# Altium PCB PCB V1.0.PcbDoc (part 2 of 2)
Units mil, origin at the board's own origin, x right, y up, seen from the top; angles counter-clockwise.
Board outline 1377.95 x 1377.95 mil, 6 copper layers (SIG/GND1, GND1, PWR, SIG/GND2, GND2, SIG/GND3), stack 60.865 mil thick; 201 components, 101 nets, 556 pads, 510 vias.
Unrouted connection lines stored in the file: 86.
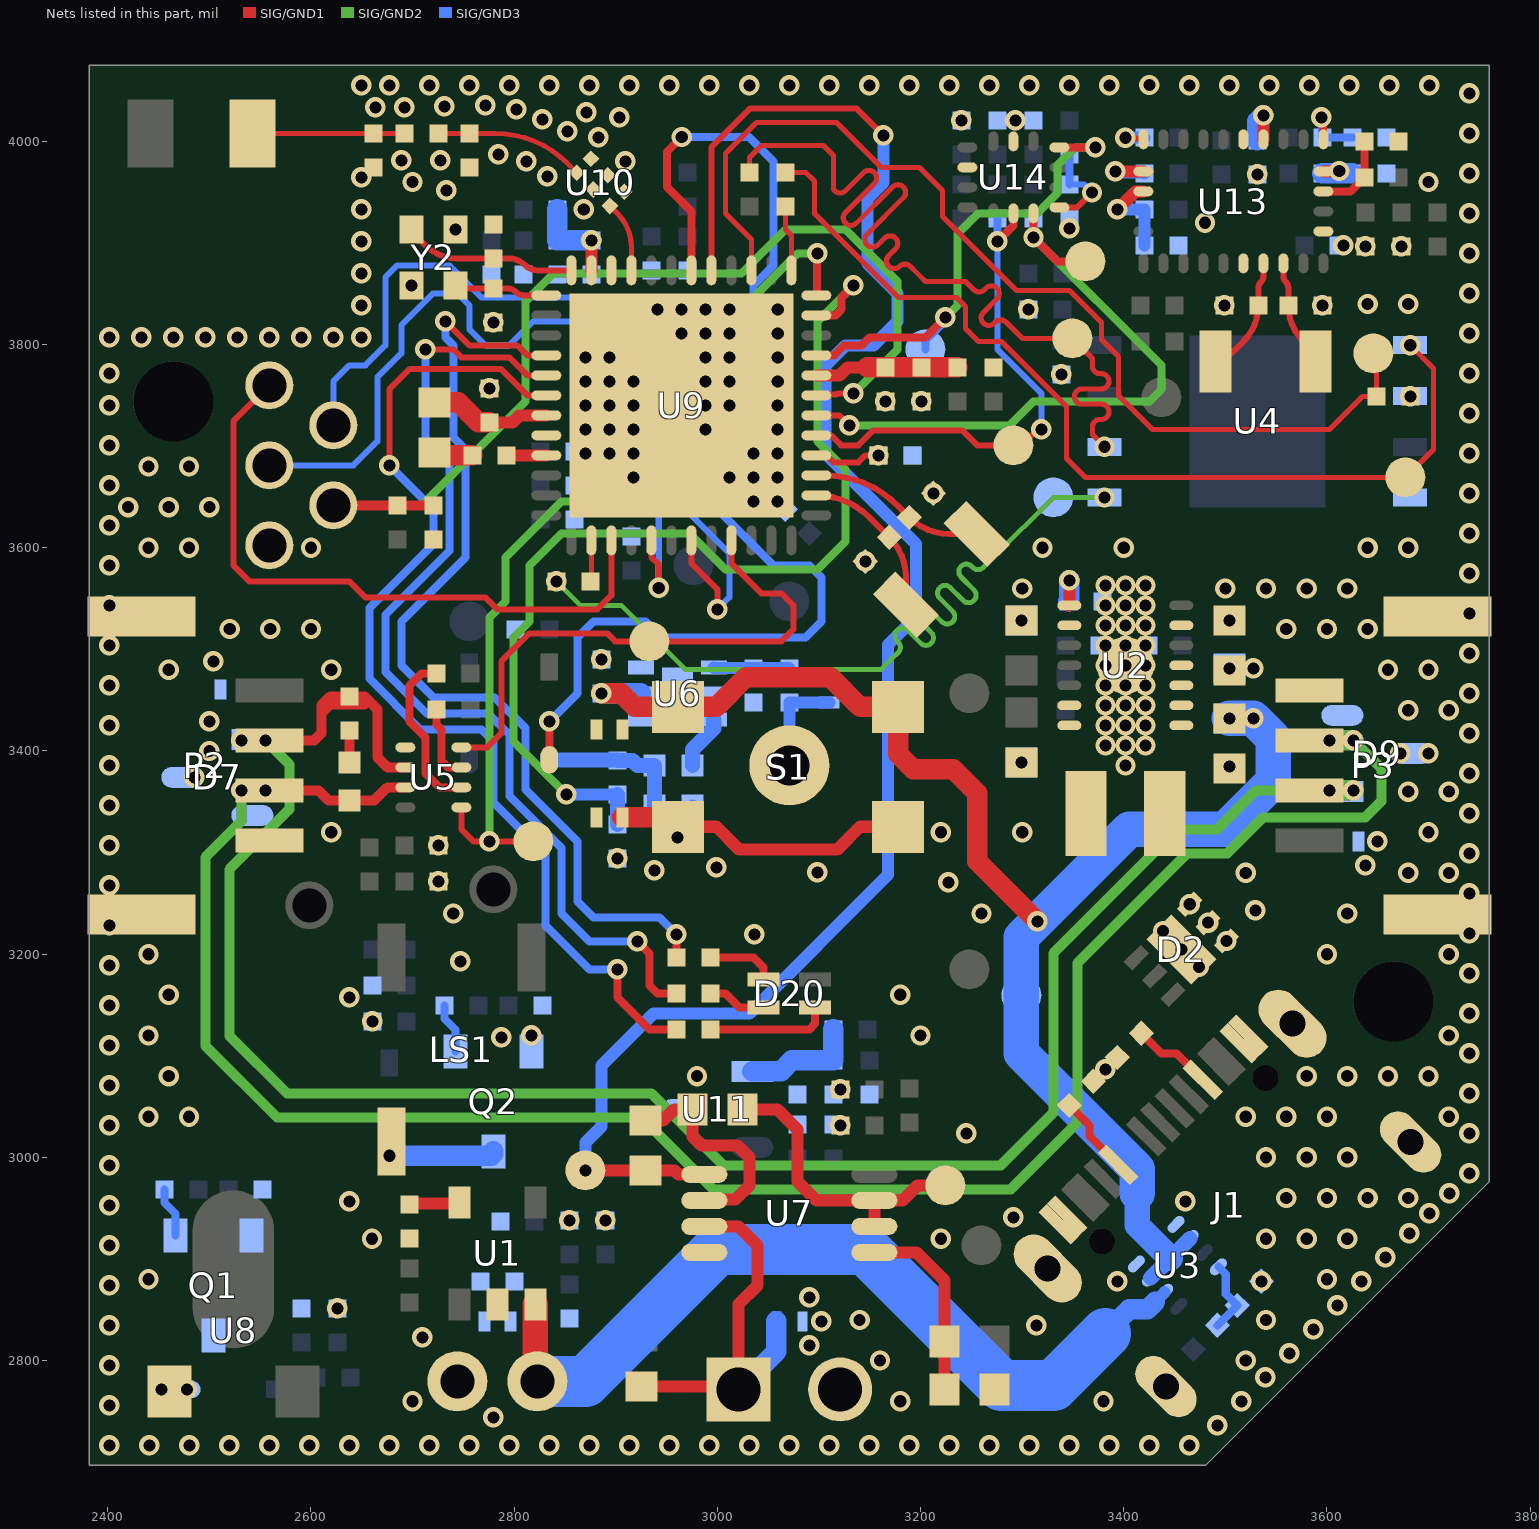
[diagram p6: the nets of this part, all layers, seen from the top]

## Via types
v1: diameter 20, hole 12, SIG/GND1 to SIG/GND3, tented both sides, 482 vias
v2: diameter 19.68, hole 11.81, SIG/GND1 to SIG/GND3, tented both sides, 28 vias

## Nets (pads, with @x,y where several pads share a name; then routed paths per layer and width w, separated by ;. In a path a pad name is that pad's centre, name@x,y a point inside that pad or via, vN(x,y) a via of type N, cw(c..) or ccw(c..) an arc to the next point about the centre after c; other vN are vias at no path point) (continued)
FLASH_CLK_1: R6.2 T17.0 U4.6 | length 923.8
  SIG/GND1 w5.04: R6.2@3031.5,3969.49 3031.5,3984.25 3043.31,3996.06 3104.33,3996.06 3114.17,3986.22 3114.17,3953.65 3114.17,3952.76 3115.51,3951.42 ccw(c3120.83,3956.74) 3126.15,3951.42 3143.92,3969.19 cw(c3149.24,3963.87) 3154.56,3969.19 cw(c3149.24,3963.87) 3154.56,3958.55 3126.12,3930.12 ccw(c3131.44,3924.8) 3126.12,3919.48 ccw(c3131.44,3924.8) 3136.76,3919.48 3172.39,3955.11 cw(c3177.7,3949.79) 3183.02,3955.11 cw(c3177.7,3949.79) 3183.02,3944.47 3147.4,3908.84 ccw(c3152.72,3903.53) 3147.4,3898.21 ccw(c3152.72,3903.53) 3158.03,3898.21 3164.65,3904.82 cw(c3169.97,3899.5) 3175.28,3904.82 cw(c3169.97,3899.5) 3175.28,3894.18 3168.67,3887.57 ccw(c3173.99,3882.25) 3168.67,3876.93 ccw(c3173.99,3882.25) 3179.31,3876.93 ; 3179.33,3876.96 cw(c3184.65,3871.64) 3189.97,3876.96 3196.8,3870.13 3198.58,3868.35 3204.72,3862.2 3244.09,3862.2 3250.49,3855.81 3252.28,3854.02 ccw(c3257.59,3859.34) 3262.91,3854.02 3264.54,3855.65 cw(c3269.86,3850.33) 3275.18,3855.65 cw(c3269.86,3850.33) 3275.18,3845.02 3261.82,3831.65 ccw(c3267.13,3826.33) 3261.82,3821.02 ccw(c3267.13,3826.33) 3272.45,3821.02 3273.55,3822.11 cw(c3278.87,3816.79) 3284.19,3822.11 3298.41,3807.89 3300.2,3806.1 T17.0@3349.41,3806.1 3369.09,3786.42 3369.09,3781.47 3369.09,3778.95 ccw(c3376.62,3778.95) 3376.62,3771.43 3377.85,3771.43 cw(c3377.85,3763.91) 3377.85,3756.39 3358.96,3756.39 ccw(c3358.96,3748.87) 3358.96,3741.35 3377.85,3741.34 cw(c3377.85,3733.82) 3377.85,3726.3 3376.62,3726.3 ccw(c3376.62,3718.78) 3369.09,3718.78 3369.09,3711.42 3372.1,3708.42 v1(3381.1,3699.41)
FLASH_CS: R12.1 U9.13 | length 65.4
  SIG/GND1 w5.04: R12.1@3066.93,3936.02 3066.93,3913.39 3072.83,3907.48 U9.13@3072.83,3873.03
FLASH_CS_1: R12.2 T19.0 U4.1 | length 946.9
  SIG/GND1 w5.04: R12.2@3066.93,3969.49 3086.98,3969.49 3095.47,3961 3095.47,3929.13 3178.15,3846.46 3235.24,3846.46 3244.09,3837.6 3244.09,3815.94 3256.89,3803.15 3279.53,3803.15 3343.5,3739.17 3343.5,3687.99 3362.2,3669.29 T19.0@3677.17,3669.29 3704.72,3696.85 3704.72,3776.57 v1(3681.89,3799.41)
FLASH_DI: R7.1 U9.38 | length 40.8
  SIG/GND1 w5.04: R7.1@2875,3566.93 2875.98,3567.91 U9.38@2875.98,3607.28
FLASH_DI_1: R7.2 T18.0 U4.5 | length 874.2
  SIG/GND2 w4.84: v1(2841.54,3566.93) 2865.16,3543.31 2905.51,3543.31 2968.5,3480.32 3161.42,3480.32 3176.18,3495.08 3177.89,3496.79 ccw(c3172.65,3502.04) 3177.89,3507.28 3176.86,3508.31 cw(c3182.11,3513.56) 3176.86,3518.81 cw(c3182.11,3513.56) 3187.35,3518.81 3200.03,3506.13 ccw(c3205.27,3511.38) 3210.52,3506.13 ccw(c3205.27,3511.38) 3210.52,3516.62 3197.84,3529.3 cw(c3203.09,3534.54) 3197.84,3539.79 cw(c3203.09,3534.54) 3208.34,3539.79 3221.01,3527.11 ccw(c3226.26,3532.36) 3231.5,3527.11 ccw(c3226.26,3532.36) 3231.5,3537.61 3218.83,3550.28 cw(c3224.07,3555.53) 3218.83,3560.77 cw(c3224.07,3555.53) 3229.32,3560.77 3242,3548.1 ccw(c3247.24,3553.34) 3252.49,3548.1 ccw(c3247.24,3553.34) 3252.49,3558.59 3239.81,3571.27 cw(c3245.06,3576.51) 3239.81,3581.76 cw(c3245.06,3576.51) 3250.3,3581.76 3251.34,3580.73 ccw(c3256.58,3585.97) 3261.83,3580.73 3271.65,3590.55 3330.51,3649.41 v1(3381.1,3649.41)
  SIG/GND3 w5.04: T18.0@3330.71,3649.61 3380.91,3649.61 v1(3381.1,3649.41)
FLASH_DO: R13.1 T20.0 U9.15 | length 1008.6
  SIG/GND1 w5.04: U9.15@3033.46,3873.03 3033.46,3903.54 3007.87,3929.13 3007.87,3988.19 3038.39,4018.7 3117.13,4018.7 3161.42,3974.41 3198.82,3974.41 3221.46,3951.77 3221.46,3926.18 3294.29,3853.35 3346.46,3853.35 3377.95,3821.85 3377.95,3805.12 3394.68,3788.39 3394.68,3750 3428.15,3716.54 3602.36,3716.54 3634.84,3749.02 R13.1@3648.62,3749.02 3648.62,3788.39 T20.0@3645.67,3791.34
FLASH_DO_1: R13.2 U4.2
  other v1: 3682.09,3749.02
FLEX_SENSE: R27.1 T21.0 U7.1 U9.17 | length 1746.1
  SIG/GND1 w6: U9.17@2994.09,3873.03 2994.09,3994.09 3032.48,4032.48 3136.81,4032.48 v1(3163.39,4005.91)
  SIG/GND1 w12: v1(2870.08,2987.2) R27.1@2929.13,2987.2 2957.68,2987.2 2961.61,2983.27 U7.1@2987.2,2983.27
  SIG/GND3 w12: v1(2870.08,2987.2) 2870.08,3014.76 2885.83,3030.51 2885.83,3090.55 2937.01,3141.73 3031.5,3141.73 3167.94,3278.18 3167.94,3504.64 3195.5,3532.2 3195.5,3603.71 3106.3,3692.91 3106.3,3779.53 3125.98,3799.21 3153.54,3799.21 3177.17,3822.83 3177.17,3850.39 3147.64,3879.92 3147.64,3943.9 3163.39,3959.65 v1(3163.39,4005.91)
GND: C1.1 C2.1 C3.2 C4.2 C5.2 C6.2 C7.2 C8.2 C9.2 C10.1 C11.2 C12.2 C13.2 C14.2 C15.1 C16.2 C17.2 C18.1 C19.2 C25.1 C26.2 C27.2 C28.2 C29.2 C32.2 C33.2 C34.2 C35.2 C36.2 C37.2 C38.2 C39.2 C40.2 C41.2 C42.2 C43.2 C44.2 C45.2 C46.2 C47.2 C48.2 C49.2 C50.2 C51.2 C52.2 C53.2 C54.2 C55.2 C56.2 C57.2 C80.2 C81.2 C82.2 C83.2 C84.2 C85.2 C86.2 C87.2 C88.2 D1.2 D2.1 D2.2 D2.3 D2.7 D6.2 D7.3 D8.2 D9.3 D10.2 D11.2 D12.2 D13.2 J1.A1 J1.A12 J1.B1 J1.B12 J1.S1 J1.S2 J1.S3 J1.S4 P2.4 P2.5 P2.6 P3.4 P3.5 P3.6 P4.2 Q1.S Q2.S R1.2 R4.1 R5.2 R9.1 R11.1 R14.1 R15.1 R24.2 R31.1 R34.1 R37.1 R39.1 R42.1 R47.1 R48.1 R49.1 R58.2 T2.0 T13.0 U1.2 U2.2 U2.13 U2.15 U3.1 U3.8 U4.4 U5.5 U6.2 U6.4 U6.6 U6.7 U7.4 U9.22 U9.32 U9.49 U10.A2 U10.B1 U10.B2 U10.B3 U11.3 U13.2 U13.10 U13.25 U14.6 Y2.2 Y2.4
  other v1: 2401.57,2716.54 2440.94,2716.54 2480.31,2716.54 2519.68,2716.54 2559.05,2716.54 2598.42,2716.54 2637.79,2716.54 2677.16,2716.54 2716.53,2716.54 2755.9,2716.54 2795.27,2716.54 2834.64,2716.54 2874.01,2716.54 2913.39,2716.54 2952.76,2716.54 2992.13,2716.54 3031.5,2716.54 3070.87,2716.54 3110.24,2716.54 3149.61,2716.54 3188.98,2716.54 3228.35,2716.54 3267.72,2716.54 3307.09,2716.54 3346.46,2716.54 3385.83,2716.54 3425.2,2716.54 3464.57,2716.54 3492.13,2736.22 2779.53,2744.09 2401.57,2755.91 2700,2760 3180,2760 3380,2760 3515.75,2759.84 3539.37,2783.46 2401.57,2795.28 3160,2800 3520,2800 3562.99,2807.09 3090.55,2814.96 2709.65,2822.83 3586.61,2830.71 2401.57,2834.65 3313.98,2834.65 3102.36,2838.58 3140,2840 3540,2840 2625.98,2851.38 3610.24,2854.33 3090.55,2862.2 2401.57,2874.02 3393.7,2877.95 3535.45,2877.97 3633.86,2877.95 2440,2880 3600,2880 3657.48,2901.57 2401.57,2913.39 2660,2920 3220,2920 3540,2920 3580,2920 3620,2920 3681.1,2925.2 2854.33,2937.99 2889.76,2937.99 3291.34,2940.94 3700.79,2944.88 2401.57,2952.76 2637.8,2956.69 3460.63,2956.69 3560,2960 3600,2960 3640,2960 3680,2960 3720.47,2964.57 3740.16,2984.25 2401.57,2992.13 3540,3000 3580,3000 3620,3000 3245.08,3023.62 3740.16,3023.62 2401.57,3031.5 3121.06,3031.5 2440,3040 2480,3040 3520,3040 3560,3040 3600,3040 3720,3040 3740.16,3062.99 3121.06,3066.93 2401.57,3070.87 2460,3080 2980,3080 3580,3080 3620,3080 3660,3080 3700,3080 3381.89,3086.61 3740.16,3102.36 2401.57,3110.24 2787.4,3118.11 2440,3120 2816.93,3120.08 3200,3120 3720,3120 2660.43,3133.86 3740.16,3141.73 2401.57,3149.61 2637.8,3157.48 2460,3160 3180,3160 3740.16,3181.1 3473.94,3187.48 2401.57,3188.98 2747.05,3192.91 2440,3200 3600,3200 3720,3200 3456.69,3204.72 3501.1,3212.94 3036.42,3219.49 3740.16,3220.47 3438.6,3222.82 2401.57,3228.35 3483,3231.03 2740,3240 3260,3240 3620,3240 3529.53,3243.11 3464.91,3249.13 3740.16,3259.84 2401.57,3267.72 3227.36,3270.67 2725.39,3271.65 3520,3280 3680,3280 3720,3280 3098.43,3280.51 2937.99,3282.48 2999.02,3285.43 3637.8,3287.4 2901.57,3294.29 3740.16,3299.21 2401.57,3307.09 2725.39,3307.09 3649.61,3311.02 2620,3320 3220,3320 3300,3320 3700,3320 3740.16,3338.58 2401.57,3346.46 3680,3360 3720,3360 2485.22,3374.02 3740.16,3377.95 3503.94,3384.84 2401.57,3385.83 3299.21,3388.78 3672.26,3397.64 3699.82,3397.64 2500,3400 3740.16,3417.32 2401.57,3425.2 2500,3429.13 3680,3440 3720,3440 3740.16,3456.69 2401.57,3464.57 2460,3480 2620,3480 3660,3480 3700,3480 2503.94,3488.19 2885.83,3490.16 3740.16,3496.06 2401.57,3503.94 2520,3520 2560,3520 2600,3520 3560,3520 3600,3520 3640,3520 3299.21,3528.54 3503.94,3528.54 3740.16,3535.43 2401.57,3543.31 3300,3560 3500,3560 3540,3560 3580,3560 3620,3560 3740.16,3574.8 2401.57,3582.68 3145.65,3586.59 2440,3600 2480,3600 2600,3600 3320,3600 3400,3600 3640,3600 3680,3600 3740.16,3614.17 2401.57,3622.05 2420,3640 2460,3640 2500,3640 3035.43,3645.67 3059.05,3645.67 3212.62,3653.56 3740.16,3653.54 2401.57,3661.42 2917.32,3669.29 3011.81,3669.29 3035.43,3669.29 3059.05,3669.29 2440,3680 2480,3680 2870.08,3692.91 2893.7,3692.91 2917.32,3692.91 3035.43,3692.91 3059.05,3692.91 3740.16,3692.91 2401.57,3700.79 2870.08,3716.54 2893.7,3716.54 2917.32,3716.54 2988.19,3716.54 3059.05,3716.54 3740.16,3732.28 2401.57,3740.16 2870.08,3740.16 2893.7,3740.16 2917.32,3740.16 2988.19,3740.16 3011.81,3740.16 3059.05,3740.16 3165.35,3744.1 3200.79,3744.1 2775.59,3756.89 2870.08,3763.78 2893.7,3763.78 2917.32,3763.78 2988.19,3763.78 3011.81,3763.78 3059.37,3763.78 3338.58,3770.67 2401.57,3771.65 3740.16,3771.65 2870.08,3787.4 2893.7,3787.4 2988.19,3787.4 3011.81,3787.4 3059.37,3787.4 2401.57,3807.09 2433.07,3807.09 2464.57,3807.09 2496.06,3807.09 2527.56,3807.09 2559.05,3807.09 2590.55,3807.09 2622.05,3807.09 2649.61,3807.09 2964.57,3811.02 2988.19,3811.02 3011.81,3811.02 3059.37,3811.02 3740.16,3811.02 2779.53,3821.85 2940.94,3834.65 2964.57,3834.65 2988.19,3834.65 3011.81,3834.65 3059.37,3834.65 3306.1,3834.65 2649.61,3838.58 3499.02,3838.58 3595.47,3838.58 3640,3840 3680,3840 3740.16,3850.39 2698.82,3858.27 2649.61,3870.08 3740.16,3889.76 3637.8,3896.65 3673.23,3896.65 3616.14,3897.64 2649.61,3901.58 2742.12,3913.39 3346.46,3914.37 3480,3920 3740.16,3929.13 2649.61,3933.07 2868.52,3933.07 2733.27,3951.77 2700,3960 3700,3960 2649.61,3964.57 2832.68,3965.55 3531.5,3967.52 3740.16,3968.5 2812.01,3980.32 2909.45,3980.32 2688.98,3981.3 2727.36,3981.3 2784.45,3987.2 2882.87,4003.94 3740.16,4007.87 2852.36,4009.84 3240.16,4020.67 3293.31,4020.67 2827.76,4021.65 2903.54,4023.62 2871.06,4028.54 2802.17,4031.5 2663.39,4033.46 2691.93,4033.46 2731.3,4034.45 2771.65,4035.43 3740.16,4047.24 2649.61,4055.12 2677.16,4055.12 2716.53,4055.12 2755.91,4055.12 2795.28,4055.12 2834.65,4055.12 2874.02,4055.12 2913.39,4055.12 2952.76,4055.12 2992.13,4055.12 3031.5,4055.12 3070.87,4055.12 3110.24,4055.12 3149.61,4055.12 3188.98,4055.12 3228.35,4055.12 3267.72,4055.12 3307.09,4055.12 3346.46,4055.12 3385.83,4055.12 3425.2,4055.43 3464.57,4055.12 3503.94,4055.12 3543.31,4055.12 3582.68,4055.12 3622.05,4055.12 3661.42,4055.12 3700.79,4055.12
  other v2: 3401.57,3385.83 3381.89,3405.51 3401.57,3405.51 3421.26,3405.51 3381.89,3425.2 3401.57,3425.2 3421.26,3425.2 3381.89,3444.88 3401.57,3444.88 3421.26,3444.88 3381.89,3464.57 3401.57,3464.57 3421.26,3464.57 3381.89,3484.25 3401.57,3484.25 3421.26,3484.25 3381.89,3503.94 3401.57,3503.94 3421.26,3503.94 3381.89,3523.62 3401.57,3523.62 3421.26,3523.62 3381.89,3543.31 3401.57,3543.31 3421.26,3543.31 3381.89,3562.99 3401.57,3562.99 3421.26,3562.99
ICM_INT1: T29.0 U9.9 U14.4 | length 491.8
  SIG/GND1 w8: U9.9@3097.44,3789.37 3114.59,3789.37 3124.43,3799.21 3141.73,3799.21 3149.6,3807.09 3204.72,3807.09 v1(3224.41,3826.77) ; U14.4@3336.61,3994.09 v1(3372.05,3994.09)
  SIG/GND2 w8: v1(3224.41,3826.77) 3236.22,3838.58 3236.22,3908.83 3256.52,3929.13 3314.49,3929.13 3334.65,3949.29 3334.65,3976.85 3351.89,3994.09 v1(3372.05,3994.09)
  SIG/GND3 w8: T29.0@3204.72,3795.28 3204.72,3803.76 3222.11,3821.15 3222.11,3824.48 v1(3224.41,3826.77)
ICM_INT2/FSYNC: U14.9
ICM_SCL: R61.2 T28.0 U9.5 U14.13 | length 504
  SIG/GND1 w6: U9.5@3097.44,3710.63 3112.02,3710.63 3121.86,3700.79 3138.78,3700.79 3153.54,3715.55 3241.14,3715.55 3255.91,3700.79 3299.36,3700.79 3315.11,3716.54 v1(3318.9,3716.54)
  SIG/GND1 w8: v1(3275.59,3901.57) 3291.34,3917.32 U14.13@3291.34,3929.13
  SIG/GND3 w6: v1(3275.59,3901.57) 3275.59,3795.28 3318.9,3751.97 v1(3318.9,3716.54)
  SIG/GND3 w8: v1(3275.59,3901.57) R61.2@3275.59,3924.21
ICM_SDA: R60.2 T27.0 U9.6 U14.14 | length 663.3
  SIG/GND1 w6: U9.6@3097.44,3730.32 3120.08,3730.32 v1(3129.92,3720.47)
  SIG/GND1 w8: U14.14@3311.02,3929.13 3311.08,3929.07 3311.08,3905.55 v1(3311.14,3905.49) 3334.75,3881.89 T27.0@3362.2,3881.89
  SIG/GND2 w8: v1(3129.92,3720.47) 3287.4,3720.47 3311.02,3744.09 3425.2,3744.09 3437.01,3755.91 3437.01,3779.63 v1(3311.14,3905.49)
  SIG/GND3 w8: R60.2@3311.02,3924.21 3311.08,3924.15 3311.08,3905.55 v1(3311.14,3905.49)
IMU_XIN32: C84.1 U13.27 Y5.1 | length 109.9
  SIG/GND1 w6: U13.27@3557.09,3879.92 3557.09,3866.96 ccw(c3563.81,3866.96) 3559.06,3862.2 cw(c3551.93,3855.08) 3562.01,3855.08 C84.1@3562.01,3838.58 ccw(c3611.91,3838.58) 3576.62,3803.3 Y5.1@3596.46,3783.46
IMU_XOUT32: C85.1 U13.26 Y5.2 | length 109.9
  SIG/GND1 w6: Y5.2@3498.03,3783.46 3517.86,3803.3 ccw(c3482.58,3838.58) C85.1@3532.48,3838.58 3532.48,3855.08 cw(c3542.56,3855.08) 3535.43,3862.2 ccw(c3530.68,3866.96) 3537.4,3866.96 U13.26@3537.4,3879.92
MCU2_ANT: U9.21 U10.A3 | length 70.1
  SIG/GND1 w5.04: U10.A3@2894.29,3936.42 2901.57,3929.13 cw(c2868.31,3895.87) 2915.35,3895.87 U9.21@2915.35,3873.03
MCU2_BOOT0: R36.1 R37.2 U9.4 | length 66.7
  SIG/GND1 w6: U9.4@3097.44,3690.95 3098.69,3689.69 3108.54,3689.69 3114.17,3684.06 3138.78,3684.06 3145.67,3690.95 v1(3158.46,3690.95)
MCU2_NRST: C48.1 R35.1 T11.0 U9.7 | length 1010.3
  SIG/GND1 w6: U9.7@3097.44,3750 3098.18,3750.74 3116.88,3750.74 3118.11,3751.97 v1(3133.86,3751.97)
  SIG/GND1 w10: T11.0@2622.05,3641.73 R35.1@2685.04,3641.73 C48.1@2720.47,3641.73
  SIG/GND2 w8: T11.0@2622.05,3641.73 2708.66,3641.73 2811.02,3744.1 2811.02,3842.52 2838.58,3870.08 3023.62,3870.08 3066.93,3913.39 3125.98,3913.39 3177.17,3862.2 3177.17,3795.28 v1(3133.86,3751.97)
MCU2_PA13_CLK: T10.0 U9.41 | length 832.4
  SIG/GND1 w6: U9.41@2935.04,3607.28 2935.04,3590.83 2942.25,3583.62 v1(2942.25,3560.56)
  SIG/GND3 w6: T10.0@2559.05,3681.1 2641.73,3681.1 2665.35,3704.73 2665.35,3767.72 2688.98,3791.34 2688.98,3818.9 2720.47,3850.39 2744.09,3850.39 2755.9,3838.58 2755.9,3814.96 2771.65,3799.21 2795.27,3799.21 2818.9,3822.84 2889.76,3822.84 2942.25,3770.35 v1(2942.25,3560.56)
MCU2_PA13_DIO: T9.0 U9.39 | length 641.7
  SIG/GND1 w6: T9.0@2559.05,3759.84 2523.62,3724.41 2523.62,3582.68 2539.37,3566.93 2637.8,3566.93 2653.54,3551.18 2771.65,3551.18 2783.46,3539.37 2881.89,3539.37 2895.67,3553.15 U9.39@2895.67,3607.28
MCU2_PB3_SWO: T12.0 U9.43 | length 851.6
  SIG/GND1 w6: U9.43@2974.41,3607.28 2974.41,3584.65 3000,3559.06 v1(3000,3539.37)
  SIG/GND3 w6: T12.0@2622.05,3720.47 2622.05,3763.78 2637.79,3779.53 2653.54,3779.53 2673.23,3799.21 2673.23,3866.14 2685.04,3877.95 2736.22,3877.95 2767.72,3846.46 2889.76,3846.46 2956.69,3779.53 2956.69,3649.61 3011.81,3594.49 3011.81,3551.18 v1(3000,3539.37)
MCU2_VFBSMPS: C47.1 L5.1 U9.31 | length 121.2
  SIG/GND1 w12: C47.1@2775.59,3723.43 2798.23,3723.43 2805.12,3730.32 U9.31@2831.69,3730.32
  SIG/GND1 w20: L5.1@2721.46,3743.11 2745.08,3743.11 2764.76,3723.43 C47.1@2775.59,3723.43
MCU2_VLXSMPS: L4.2 U9.33 | length 39.4
  SIG/GND1 w12: L4.2@2792.32,3690.95 U9.33@2831.69,3690.95
NetANT1_1: ANT1.1 C57.1 L6.2 | length 149.6
  SIG/GND1 w5.04: ANT1.1@2542.32,4007.88 C57.1@2661.42,4007.88 L6.2@2691.93,4007.88
NetC14_1: C14.1 C15.2 FB5.2 U11.1 | length 114.7
  SIG/GND3 w20: U11.1@3034.47,3084.65 3034.75,3084.93 3062.73,3084.93 3073.27,3095.47 C15.2@3078.74,3095.47 C14.1@3114.17,3095.47 FB5.2@3114.17,3125.98
NetC16_1: C16.1 FB2.2 U2.10 U2.11
  other v1: 3503.94,3481.3 3527.56,3481.3
NetC17_1: C17.1 U2.1 | length 45.8
  SIG/GND1 w12: U2.1@3346.46,3543.31 v1(3346.46,3567.91)
  SIG/GND3 w20: C17.1@3345.47,3547.24 ccw(c3345.47,3548.23) 3346.46,3548.23 v1(3346.46,3567.91)
NetC29_1: C29.1 R20.1 U6.1 | length 74.8
  SIG/GND3 w12: U6.1@2996.46,3482.28 2996.95,3481.79 3070.37,3481.79 R20.1@3070.87,3481.3
NetC37_1: C37.1 C38.1 FB8.1 U9.23 | length 93.5
  SIG/GND1 w12: U9.23@2875.98,3873.03 v1(2875.98,3902.56)
  SIG/GND3 w20: FB8.1@2842.52,3933.07 C38.1@2842.52,3902.56 v1(2875.98,3902.56)
NetC49_1: C49.1 C50.1 FB9.1 U9.8 | length 142
  SIG/GND1 w12: U9.8@3097.44,3769.69 3120.08,3769.69 3127.95,3777.56 3147.64,3777.56
  SIG/GND1 w20: 3147.64,3777.56 C49.1@3165.35,3777.56 C50.1@3200.79,3777.56 FB9.1@3236.22,3777.56
NetC52_1: C52.1 U9.2 Y1.1 | length 156.5
  SIG/GND1 w6: U9.2@3097.44,3651.58 cw(c3097.44,3577.81) 3149.6,3629.97 C52.1@3169.31,3610.26 cw(c3129.81,3570.76) 3185.67,3570.76 Y1.1@3185.67,3543.94
NetC53_1: C53.1 U9.3 Y1.2 | length 175
  SIG/GND1 w6: U9.3@3097.44,3671.26 3106.17,3671.26 cw(c3106.17,3571.26) 3176.89,3641.97 C53.1@3188.95,3629.9 ccw(c3228.46,3669.4) 3228.46,3613.54 Y1.2@3255.27,3613.54
NetC54_1: C54.1 U9.24 Y2.1 | length 171.5
  SIG/GND1 w6: Y2.1@2698.82,3913.39 ccw(c2703.57,3913.39) 2700.21,3910.03 2712.6,3897.64 ccw(c2743.49,3928.53) 2743.49,3884.84 C54.1@2779.53,3884.84 2794.39,3884.84 cw(c2794.39,3861.32) 2811.02,3877.95 ccw(c2822.9,3889.83) 2822.9,3873.03 U9.24@2856.3,3873.03
NetC55_1: C55.1 U9.25 Y2.3 | length 92.2
  SIG/GND1 w6: Y2.3@2742.12,3858.27 ccw(c2749.25,3865.4) 2749.25,3855.32 C55.1@2779.53,3855.32 2793.58,3855.32 cw(c2793.58,3844.39) 2801.31,3852.11 ccw(c2810.21,3861.02) 2810.21,3848.43 U9.25@2831.69,3848.43
NetC56_1: C56.1 L6.1 U10.A1 | length 148
  SIG/GND1 w5.04: L6.1@2725.39,4007.88 C56.1@2755.9,4007.88 2781.41,4007.88 cw(c2781.41,3907.88) 2852.12,3978.59 U10.A1@2861.61,3969.1
NetC83_1: C83.1 U13.9 | length 50.7
  SIG/GND1 w12: U13.9@3537.4,4001.97 v1(3537.4,4025.59)
  SIG/GND3 w20: C83.1@3531.5,4000.98 3531.5,4019.68 v1(3537.4,4025.59)
NetD4_2: D4.2 U9.18 | length 1187.5
  SIG/GND1 w8: D4.2@2834.65,3391.34 v1(2834.65,3429.13) ; v1(2965.01,4004.39) 2950.47,3989.84 2950.47,3955.04 2974.41,3931.1 U9.18@2974.41,3873.03
  SIG/GND3 w8: v1(2834.65,3429.13) 2862.2,3456.69 2862.2,3511.81 2877.95,3527.56 2929.13,3527.56 2944.88,3511.81 3086.61,3511.81 3102.36,3527.56 3102.36,3570.87 3090.55,3582.68 3055.12,3582.68 2988.19,3649.61 2988.19,3681.1 3035.43,3728.35 3035.43,3858.27 3055.12,3877.95 3055.12,3980.32 3031.05,4004.39 v1(2965.01,4004.39)
NetD5_2: D5.2 R21.2 R22.2 R23.1 | length 145
  SIG/GND3 w15: D5.2@2834.65,3391.34 2834.94,3391.04 2901.28,3391.04 R21.2@2901.57,3390.75 2916.34,3390.75 2921.26,3385.83 R22.2@2937.99,3385.83 R23.1@2937.99,3346.46
NetD10_1: D10.1 P4.1 R25.1 U7.3 | length 388.1
  SIG/GND1 w12: R25.1@2925.2,2774.61 3013.74,2774.61 cw(c3013.74,2764.52) P4.1@3020.87,2771.65 3020.87,2855.51 3039.37,2874.02 3039.37,2913.39 3020.67,2932.09 U7.3@2987.2,2932.09
  SIG/GND3 w20: P4.1@3020.87,2771.65 3058.07,2808.86 D10.1@3058.07,2838.58
NetD12_1: D12.1 R23.2 S1.3 S1.4 | length 332.8
  SIG/GND1 w12: S1.3@2961.46,3325.35 2999.14,3325.35 3021.34,3303.15 3118.11,3303.15 3140.31,3325.35 S1.4@3178,3325.35
  SIG/GND1 w20: D12.1@2906.5,3334.65 2952.16,3334.65 cw(c2952.16,3325.35) S1.3@2961.46,3325.35
  SIG/GND3 w12: v1(2960.63,3314.96) 2975.39,3329.72 R23.2@2975.39,3346.46
NetD20_1: D20.1 R28.2 | length 68.1
  SIG/GND1 w8: R28.2@2993.11,3196.85 3035.43,3196.85 3045.47,3186.81 D20.1@3045.47,3175.2
NetD20_3: D20.3 R32.1 | length 121.5
  SIG/GND1 w8: R32.1@2993.11,3125.98 3090.55,3125.98 3096.26,3131.69 D20.3@3096.26,3147.64
NetD20_4: D20.4 R29.1 | length 58.1
  SIG/GND1 w8: R29.1@2993.11,3161.42 3007.87,3161.42 3021.65,3147.64 D20.4@3045.47,3147.64
NetD21_2: D21.2 Q1.D U8.2
  other v1: 2452.76,2771.65 2477.95,2771.65
NetD22_2: D22.2 LS1.2 Q2.D | length 107.7
  SIG/GND3 w20: D22.2@2677.17,3003.66 v1(2677.17,3001.57) 2777.72,3001.57 2779.53,3003.39 Q2.D@2779.53,3005.91
NetJ1_A5: J1.A5 R14.2 | length 78.2
  SIG/GND1 w8: R14.2@3346.44,3051.16 3366.14,3031.46 3366.14,3020.95 J1.A5@3394.34,2992.76
NetJ1_B5: J1.B5 R15.2 | length 79.5
  SIG/GND1 w8: R15.2@3417.34,3122.07 3437.05,3102.36 3451.77,3102.36 J1.B5@3477.85,3076.28
NetL2_1: L2.1 U2.6 U2.7
NetL2_2: L2.2 U2.8 U2.9
NetL4_1: L4.1 L5.2 | length 38.6
  SIG/GND1 w20: L5.2@2721.46,3693.9 2724.41,3690.95 L4.1@2758.86,3690.95
NetQ1_G: Q1.G R30.2 | length 49.8
  SIG/GND3 w8: R30.2@2455.71,2968.5 2455.71,2955.37 2466.54,2944.55 Q1.G@2466.54,2923.23
NetQ2_G: Q2.G R33.2 | length 49.8
  SIG/GND3 w8: R33.2@2731.3,3149.61 2731.3,3136.48 2742.13,3125.65 Q2.G@2742.13,3104.33
NetR1_1: R1.1 U1.5 | length 50
  SIG/GND1 w12: R1.1@2696.85,2953.74 2697.83,2954.72 2745.08,2954.72 U1.5@2746.06,2955.71
NetR10_1: R10.1 R11.2 U3.4 | length 73.5
  SIG/GND3 w8: R10.1@3492.15,2834.67 R11.2@3511.79,2854.31 3500.43,2865.68 3500.43,2885.01 U3.4@3493.12,2892.31
NetR18_1: R18.1 R19.2 | length 31.5
  SIG/GND1 w10: R18.1@2637.8,3388.78 R19.2@2637.8,3420.28
NetR21_1: R21.1 R24.1 U9.11 | length 1017
  SIG/GND1 w8: U9.11@3097.44,3828.74 3116.14,3828.74 3122.05,3834.65 3122.05,3846.46 v1(3133.86,3858.27)
  SIG/GND2 w8: v1(2851.38,3357.28) 2799.21,3409.45 2799.21,3511.81 2814.96,3527.56 2814.96,3582.68 2846.46,3614.17 2972.44,3614.17 3007.87,3578.74 3098.43,3578.74 3125.98,3606.3 3125.98,3677.17 3098.43,3704.72 3098.43,3822.84 v1(3133.86,3858.27)
  SIG/GND3 w12: v1(2851.38,3357.28) R21.1@2901.57,3357.28
  SIG/GND3 w15: R24.1@2901.57,3327.76 R21.1@2901.57,3357.28
NetR22_1: R22.1 U6.3 | length 54
  SIG/GND3 w15: R22.1@2975.39,3385.83 2975.39,3401.26 2996.46,3422.32 U6.3@2996.46,3431.1
NetR26_1: R26.1 R39.2 U7.5 | length 187.6
  SIG/GND1 w12: U7.5@3154.53,2906.5 3195.87,2906.5 3223.43,2878.94 R26.1@3223.43,2818.9 R39.2@3223.43,2771.65
NetR27_2: R27.2 R38.2 U7.2 | length 219.9
  SIG/GND1 w12: R27.2@2929.13,3036.42 2946.48,3036.42 2957.31,3047.24 R38.2@2975.39,3047.24 2975.39,3020.67 2984.25,3011.81 3019.69,3011.81 3031.5,3000 3031.5,2972.44 3017.68,2958.62 2988.15,2958.62 U7.2@2987.2,2957.68
NetR38_1: R38.1 T23.0 U7.6 U7.7 | length 298.6
  SIG/GND1 w12: R38.1@3024.61,3047.24 3059.06,3047.24 3078.74,3027.56 3078.74,2976.38 3097.44,2957.68 U7.7@3154.53,2957.68 ; U7.6@3154.53,2932.09 U7.7@3154.53,2957.68 ; T23.0@3224.41,2972.44 3196.85,2972.44 3182.09,2957.68 U7.7@3154.53,2957.68
NetR41_2: R41.2 R42.2 U13.4 | length 81.5
  SIG/GND1 w8: U13.4@3596.46,3950.79 3623.03,3950.79 R41.2@3636.81,3964.57 R42.2@3636.81,4000
NetR44_1: R44.1 R47.2 U13.6 | length 72.1
  SIG/GND1 w8: v1(3594.49,4023.62) 3596.1,4022.01 3596.1,4002.32 U13.6@3596.46,4001.97
  SIG/GND3 w8: v1(3594.49,4023.62) 3594.98,4023.13 3594.98,4004.43 R44.1@3595.47,4003.94 R47.2@3625,4003.94
NetR45_1: R45.1 R48.2 U13.5 | length 45.2
  SIG/GND1 w12: U13.5@3596.46,3970.47 v1@3612.11,3970.47
  SIG/GND3 w20: R45.1@3595.47,3968.5 R48.2@3625,3968.5
  other v1: 3612.11,3970.79
NetR46_1: R46.1 R49.2 U13.17 | length 94.9
  SIG/GND1 w12: v1(3393.7,3933.07) 3411.42,3950.79 U13.17@3419.29,3950.79
  SIG/GND3 w12: v1(3393.7,3933.07) R46.1@3420.28,3933.07 R49.2@3420.28,3897.64
NetR50_1: R50.1 U13.15 | length 37.2
  SIG/GND1 w6: v1(3401.57,4003.62) 3402.4,4002.8 3418.46,4002.8 U13.15@3419.29,4001.97
  SIG/GND3 w12: v1(3401.57,4003.62) 3401.73,4003.78 3420.12,4003.78 R50.1@3420.28,4003.94
NetR52_1: R52.1 U13.16 | length 56.9
  SIG/GND1 w12: v1(3391.73,3970.47) U13.16@3419.29,3970.47
  SIG/GND3 w12: v1(3391.73,3970.47) 3392.72,3969.49 3419.29,3969.49 R52.1@3420.28,3968.5
NetR58_1: R58.1 R59.2 U14.1 | length 93.3
  SIG/GND1 w6: U14.1@3336.61,3935.04 3354.07,3935.04 v1(3368.74,3949.71)
  SIG/GND3 w6: R58.1@3346.46,3957.68 3360.77,3957.68 v1(3368.74,3949.71)
  SIG/GND3 w8: R58.1@3346.46,3957.68 R59.2@3346.46,3987.2
RGB_BLUE: R32.2 U9.30 | length 1039.9
  SIG/GND1 w6: v1(2677.16,3681.1) 2677.16,3755.91 2697.41,3776.15 2786.84,3776.15 2812.99,3750 U9.30@2831.69,3750
  SIG/GND1 w8: v1(2901.57,3185.04) 2901.57,3157.48 2933.07,3125.98 R32.2@2959.65,3125.98
  SIG/GND3 w8: v1(2677.16,3681.1) 2720.47,3637.8 2720.47,3603.6 2657.48,3540.61 2657.48,3471.16 2707.38,3421.26 2767.72,3421.26 2779.53,3409.45 2779.53,3349.16 2830.71,3297.98 2830.71,3228.35 2874.02,3185.04 v1(2901.57,3185.04)
RGB_GREEN: R29.2 U9.29 | length 992
  SIG/GND1 w6: v1(2712.6,3795.28) 2740.16,3795.28 2748.03,3787.4 2795.27,3787.4 2812.99,3769.69 U9.29@2831.69,3769.69
  SIG/GND1 w8: v1(2921.26,3212.6) 2933.07,3200.79 2933.07,3169.29 2940.94,3161.42 R29.2@2959.65,3161.42
  SIG/GND3 w8: v1(2712.6,3795.28) 2712.6,3704.73 2736.22,3681.1 2736.22,3597.07 2673.23,3534.08 2673.23,3477.68 2713.9,3437.01 2774.24,3437.01 2795.28,3415.97 2795.28,3355.68 2846.46,3304.5 2846.46,3240.16 2874.02,3212.6 v1(2921.26,3212.6)
RGB_RED: R28.1 U9.28 | length 959
  SIG/GND1 w6: v1(2732.28,3822.84) 2755.9,3799.21 2803.15,3799.21 2812.99,3789.37 U9.28@2831.69,3789.37
  SIG/GND1 w8: R28.1@2959.65,3196.85 v1(2959.65,3219.49)
  SIG/GND3 w8: v1(2732.28,3822.84) 2732.28,3807.09 2740.16,3799.21 2740.16,3708.66 2751.97,3696.85 2751.97,3590.55 2688.98,3527.56 2688.98,3484.2 2720.42,3452.76 2780.76,3452.76 2811.02,3422.49 2811.02,3362.2 2862.2,3311.02 2862.2,3251.97 2877.95,3236.22 2942.91,3236.22 v1(2959.65,3219.49)
RS485_A: D7.1 D9.1 P2.2 P3.2 R19.1 U5.6 | length 2023.1
  SIG/GND1 w10: P2.2@2559.06,3410.43 2603.35,3410.43 2610.24,3417.32 2610.24,3437.01 ; 2652.56,3445.87 2619.09,3445.87 2610.24,3437.01 ; U5.6@2692.91,3383.86 2675.2,3383.86 2665.35,3393.7 2665.35,3440.94 2652.56,3453.74 2619.09,3453.74 2610.24,3444.88 2610.24,3437.01
  SIG/GND2 w10: v1(2555.12,3410.43) 2578.74,3386.81 2578.74,3342.52 2519.68,3283.46 2519.68,3119.64 2576.33,3062.99 2934.98,3062.99 3005.85,2992.13 3278.93,2992.13 3330.71,3043.91 3330.71,3200.79 3452.76,3322.83 3492.13,3322.83 3530.51,3361.22 v1(3602.36,3361.22)
  SIG/GND2 w20: v1(2531.5,3410.43) v1(2555.12,3410.43) ; v1(3602.36,3361.22) v1(3625.98,3361.22)
RS485_B: D7.2 D9.2 P2.3 P3.3 R18.2 U5.7 | length 1978.3
  SIG/GND1 w10: P2.3@2574.8,3361.22 2607.28,3361.22 2617.13,3351.38 2662.4,3351.38 2675.2,3364.17 U5.7@2692.91,3364.17
  SIG/GND2 w10: v1(2531.5,3361.22) 2531.5,3330.71 2496.06,3295.28 2496.06,3109.85 2566.54,3039.37 2925.2,3039.37 2996.06,2968.5 3288.71,2968.5 3354.33,3034.12 3354.33,3191 3462.54,3299.21 3501.91,3299.21 3537.34,3334.65 3637.8,3334.65 3653.54,3350.39 3653.54,3382.87 v1(3625.98,3410.43)
  SIG/GND2 w20: v1(2531.5,3361.22) v1(2555.12,3361.22) ; v1(3602.36,3410.43) v1(3625.98,3410.43)
RS485_R\E\: R16.1 U5.2 | length 165.7
  SIG/GND1 w8: R16.1@2723.43,3476.38 2708.66,3476.38 2696.85,3464.57 2696.85,3429.13 2712.6,3413.39 2712.6,3377.95 2726.38,3364.17 U5.2@2748.03,3364.17
RS485_RX: T15.0 U5.1 U9.12 | length 925.4
  SIG/GND1 w6: U5.1@2748.03,3344.49 2748.03,3322.83 2759.84,3311.02 v1(2775.59,3311.02) T15.0@2818.9,3311.02
  SIG/GND1 w8: U9.12@3097.44,3848.43 3097.93,3848.92 3097.93,3889.27 v1(3098.42,3889.76)
  SIG/GND2 w8: v1(2775.59,3311.02) 2775.59,3531.5 2791.34,3547.24 2791.34,3590.55 2846.46,3645.67 2952.76,3645.67 3035.43,3728.35 3035.43,3846.46 3078.74,3889.76 v1(3098.42,3889.76)
RS485_S\H\D\N\: R17.1 U5.3 | length 75.1
  SIG/GND1 w8: R17.1@2723.43,3440.94 2723.43,3426.18 2728.35,3421.26 2728.35,3390.24 2734.72,3383.86 U5.3@2748.03,3383.86
RS485_TX: T16.0 U5.4 U9.45 | length 547.3
  SIG/GND1 w6: U5.4@2748.03,3403.54 2773.62,3403.54 2787.4,3417.32 2787.4,3488.19 2814.96,3515.75 2891.48,3515.75 2899.36,3507.87 T16.0@2933.07,3507.87 3062.99,3507.87 3074.8,3519.68 3074.8,3543.31 3062.99,3555.12 3043.31,3555.12 3013.78,3584.65 U9.45@3013.78,3607.28
Touch_input: D11.1 R20.2 TP1.0 | length 101.4
  SIG/GND3 w12: TP1.0@3070.87,3385.83 R20.2@3070.87,3447.83 D11.1@3110.24,3447.83
VBAT: C2.2 D1.1 R2.2 T1.0 U1.3 U3.6 | length 840.4
  SIG/GND1 w25: T1.0@2820.87,2779.53 U1.3@2820.87,2855.31
  SIG/GND3 w12: 3430.75,2857.77 U3.6@3440.23,2867.25
  SIG/GND3 w20: 3381.89,2826.77 3405.51,2850.39 3423.37,2850.39 3430.75,2857.77
  SIG/GND3 w50: T1.0@2822.83,2779.53 2870.08,2779.53 3000,2909.45 3145.67,2909.45 3279.53,2775.59 3330.71,2775.59 3381.89,2826.77
VBAT/5V: C3.1 C28.1 D13.1 FB2.1 S1.1 S1.2 T5.0 U3.2 U3.7 U6.5 | length 1488.7
  SIG/GND1 w20: v1(2885.83,3456.69) 2905.51,3456.69 2918.74,3443.46 S1.1@2961.46,3443.46 2999.14,3443.46 3028.12,3472.44 3111.34,3472.44 3140.31,3443.46 S1.2@3178,3443.46 3178,3396.81 3192.91,3381.89 3232.28,3381.89 3255.91,3358.27 3255.91,3291.34 v1(3314.96,3232.28)
  SIG/GND3 w15: U3.7@3426.31,2881.17 3445.8,2900.66 U3.2@3465.28,2920.15
  SIG/GND3 w20: v1(2885.83,3456.69) U6.5@2924.8,3456.69
  SIG/GND3 w25: 3413.39,2964.57 3413.39,2933.07 3445.8,2900.66
  SIG/GND3 w35: 3413.39,2964.57 3413.39,2988.19 3299.21,3102.36 3299.21,3216.54 3405.51,3322.83 3500,3322.83 3547.24,3370.08 3547.24,3412.4 v1(3527.56,3432.09) v1(3503.94,3432.09)
pads on no net: ANT1.2 J1. J1.A6 J1.A7 J1.A8 J1.B6 J1.B7 J1.B8 LS1.3 U2.14 U4.9 U8.3 U9.26 U9.27 U9.46 U9.47 U13.1 U13.7 U13.8 U13.12 U13.13 U13.18 U13.21 U13.22 U13.23 U13.24 U14.2 U14.3 U14.7 U14.10 U14.11

## Polygon pours and split planes (outlines as drawn)
GND on SIG/GND3 "NONET_L-01_P-001" (solid, pour order 2): 2381.89,2696.85 2381.89,3818.9 2637.79,3818.9 2637.79,4074.8 3759.84,4074.8 3759.84,2976.38 3480.31,2696.85 2381.89,2696.85
3V3_main on PWR "NONET_L-01_P-001" (solid, pour order 0): 3055.12,2874.02 3350.39,3169.29 3350.39,3598.43 3456.69,3704.72 3645.67,3704.72 3724.41,3783.46 3724.41,3948.82 3677.17,3996.06 2811.02,3996.06 2748.03,3933.07 2748.03,3736.22 2661.42,3649.61 2661.42,3440.94 2511.81,3291.34 2511.81,2940.94 2578.74,2874.02
GND on PWR "NONET_L-01_P-001" (solid, pour order 1): 2381.89,2696.85 2381.89,3818.9 2637.79,3818.9 2637.79,4074.8 3759.84,4074.8 3759.84,2976.38 3480.31,2696.85 2381.89,2696.85
GND on SIG/GND2 "NONET_L-01_P-001" (solid, pour order 3): 2381.89,2696.85 2381.89,3818.9 2637.79,3818.9 2637.79,4074.8 3759.84,4074.8 3759.84,2976.38 3480.31,2696.85 2381.89,2696.85
GND on SIG/GND1 "NONET_L-01_P-001" (solid, pour order 4): 2381.89,2696.85 2381.89,3818.9 2637.8,3818.9 2637.8,4074.8 3759.84,4074.8 3759.84,2976.38 3480.32,2696.85 2381.89,2696.85
GND on GND2 (split plane): 3754.74,2978.49 3478.2,2701.95 2386.99,2701.95 2386.99,3818.9 2637.79,3818.9 2637.79,4069.71 3754.74,4069.71
GND on GND1 (split plane): 3754.74,2978.49 3478.2,2701.95 2386.99,2701.95 2386.99,3818.9 2637.79,3818.9 2637.79,4069.71 3754.74,4069.71

## Keep-outs
SIG/GND1:
  region: 2381.89,4074.8 2381.89,3818.9 2637.79,3818.9 2637.79,4074.8
PWR:
  region: 2381.89,4074.8 2381.89,3818.9 2637.79,3818.9 2637.79,4074.8
SIG/GND2:
  region: 2381.89,4074.8 2381.89,3818.9 2637.79,3818.9 2637.79,4074.8
SIG/GND3:
  region: 2381.89,4074.8 2381.89,3818.9 2637.79,3818.9 2637.79,4074.8
Keep-Out Layer:
  the board outline again, w8.27

## Other copper
SIG/GND1:
  region net 3V3_BZ: 2661.42,3172.55 ccw(c2688.3,3172.55) 2669.29,3153.54 2675.53,3147.3 cw(c2662.09,3133.86) 2681.1,3133.86 ccw(c2696.85,3133.86) 2696.85,3118.11 ccw(c2696.85,3137.8) 2716.54,3137.8 2716.54,3208.66 ccw(c2688.98,3208.66) 2688.98,3236.22 2673.23,3236.22 ccw(c2673.23,3224.41) 2661.42,3224.41
  region net NetC16_1: 3460.39,3491.14 cw(c3460.39,3481.06) 3467.52,3488.19 3467.69,3488.02 ccw(c3474.41,3494.74) 3474.41,3485.24 3479.33,3485.24 ccw(c3479.33,3494.09) 3488.19,3494.09 3526.57,3494.09 cw(c3526.57,3482.28) 3538.39,3482.28 3538.39,3473.43 cw(c3522.64,3473.43) 3522.64,3457.68 3449.8,3457.68 cw(c3449.8,3464.57) 3442.91,3464.57 3442.91,3484.25 cw(c3449.8,3484.25) 3449.8,3491.14
  region net VBAT/5V: 3492.13,3413.39 cw(c3492.13,3421.26) 3484.25,3421.26 3484.25,3444.88 cw(c3492.13,3444.88) 3492.13,3452.76 3523.62,3452.76 cw(c3523.62,3437.01) 3539.37,3437.01 3539.37,3433.07 cw(c3519.68,3433.07) 3519.68,3413.39
  region net RS485_B: 2527.56,3375.98 ccw(c2527.56,3364.17) 2515.75,3364.17 2515.75,3356.3 ccw(c2527.56,3356.3) 2527.56,3344.49 2567.6,3344.49 ccw(c2567.6,3371.37) 2586.61,3352.36 2586.61,3372.05 ccw(c2577.11,3362.54) 2577.11,3375.98
  region net RS485_A: 2527.56,3425.2 ccw(c2527.56,3413.39) 2515.75,3413.39 2515.75,3405.51 ccw(c2527.56,3405.51) 2527.56,3393.7 2567.6,3393.7 ccw(c2567.6,3420.58) 2586.61,3401.57 2586.61,3421.26 ccw(c2577.11,3411.75) 2577.11,3425.2
  region net RS485_B: 3625.98,3427.17 cw(c3625.98,3411.42) 3641.73,3411.42 3641.73,3407.48 cw(c3629.92,3407.48) 3629.92,3395.67 3551.18,3395.67 cw(c3551.18,3399.61) 3547.24,3399.61 3547.24,3423.23 cw(c3551.18,3423.23) 3551.18,3427.17
  region net RS485_A: 3625.98,3377.95 cw(c3625.98,3362.2) 3641.73,3362.2 3641.73,3358.27 cw(c3629.92,3358.27) 3629.92,3346.46 3551.18,3346.46 cw(c3551.18,3350.39) 3547.24,3350.39 3547.24,3374.02 cw(c3551.18,3374.02) 3551.18,3377.95
  region net VBAT/5V: 2897.64,3413.39 2897.64,3429.13 ccw(c2881.89,3429.13) 2881.89,3444.88 cw(c2881.89,3452.76) 2874.02,3452.76 2874.02,3460.63 cw(c2881.89,3460.63) 2881.89,3468.5 2984.25,3468.5 2984.25,3421.26 cw(c2955.74,3449.77) 2955.74,3409.45 2901.57,3409.45 cw(c2901.57,3413.39)
  region net 5V_in: 3459.65,3113.19 3434.41,3138.42 ccw(c3419.29,3123.3) 3419.29,3144.69 3413.29,3144.69 ccw(c3413.29,3121.16) 3396.65,3137.8 3379.92,3154.53 3379.92,3176.45 cw(c3410.17,3176.45) 3388.78,3197.83 3396.99,3206.05 cw(c3410.43,3192.6) 3410.43,3211.61 3410.77,3211.61 cw(c3410.77,3198.17) 3420.28,3207.68 3476.14,3151.81 cw(c3466.06,3141.73) 3480.32,3141.73 3480.32,3135.32 ccw(c3500.48,3135.32) 3486.22,3121.06 3470.18,3105.03 cw(c3468.5,3106.71) 3468.5,3104.33
  region net 3V3_MCU2: 3082.68,3631.89 cw(c3072.83,3631.89) 3072.83,3622.05 ccw(c3072.83,3617.13) 3067.91,3617.13 3067.91,3597.44 ccw(c3072.83,3597.44) 3072.83,3592.52 ccw(c3072.83,3631.89) 3112.2,3631.89 ccw(c3107.28,3631.89) 3107.28,3636.81 3087.6,3636.81 ccw(c3087.6,3631.89)
  region net 3V3_MCU2: 2811.02,3677.17 ccw(c2811.02,3645.67) 2779.53,3645.67 2779.53,3641.73 ccw(c2791.34,3641.73) 2791.34,3629.92 ccw(c2791.34,3639.43) 2798.06,3632.71 2805.45,3640.1 cw(c2818.9,3626.66) 2818.9,3645.67 2842.52,3645.67 ccw(c2842.52,3651.58) 2848.42,3651.58 2848.42,3672.25 ccw(c2843.5,3672.25) 2843.5,3677.17
  region net NetL2_2: 3449.8,3451.77 ccw(c3449.8,3444.88) 3442.91,3444.88 3442.91,3402.56 cw(c3420.28,3402.56) 3420.28,3379.92 3420.28,3297.24 3459.65,3297.24 ccw(c3426.38,3330.51) 3473.43,3330.51 3473.43,3444.88 ccw(c3466.54,3444.88) 3466.54,3451.77
  region net NetL2_1: 3353.35,3451.77 cw(c3353.35,3444.88) 3360.24,3444.88 3360.24,3402.56 ccw(c3382.87,3402.56) 3382.87,3379.92 3382.87,3297.24 3343.5,3297.24 cw(c3376.77,3330.51) 3329.72,3330.51 3329.72,3444.88 cw(c3336.61,3444.88) 3336.61,3451.77
  region net 3V3_main: 3352.36,3457.68 ccw(c3352.36,3464.57) 3359.25,3464.57 3359.25,3484.25 ccw(c3353.35,3484.25) 3353.35,3490.16 3340.96,3490.16 ccw(c3340.96,3486.8) 3338.58,3489.17 cw(c3333.83,3493.93) 3333.83,3487.2 3328.74,3487.2 cw(c3328.74,3503.84) 3316.98,3492.08 3314.96,3494.09 ccw(c3307.83,3486.97) 3307.83,3497.05 3255.91,3497.05 ccw(c3255.91,3481.3) 3255.33,3497.04 ccw(c3254.34,3450.49) 3254.34,3497.05 ccw(c3254.34,3463.18) 3220.47,3463.18 3220.47,3446.85 ccw(c3252.95,3446.85) 3252.95,3414.37 3309.06,3414.37 ccw(c3309.06,3427.17) 3321.85,3427.17 3321.85,3444.88 cw(c3334.65,3444.88) 3334.65,3457.68 3326.91,3457.68
  region net 3V3_ERM: 2559.05,2787.4 cw(c2570.87,2787.4) 2570.87,2799.21 2590.55,2799.21 ccw(c2590.55,2818.9) 2610.24,2818.9 cw(c2622.05,2818.9) 2622.05,2830.71 2625.98,2830.71 cw(c2625.98,2818.9) 2637.8,2818.9 cw(c2618.79,2818.9) 2632.23,2805.46 2626.46,2799.69 ccw(c2646.62,2779.53) 2618.11,2779.53 2618.11,2751.97 cw(c2606.3,2751.97) 2606.3,2740.16 2566.93,2740.16 cw(c2566.93,2748.03) 2559.05,2748.03
PWR:
  region net 3V3_MCU2: 2814.96,3712.6 cw(c2786.45,3712.6) 2806.61,3692.44 2786.73,3672.55 ccw(c2813.61,3645.67) 2775.59,3645.67 2775.59,3641.73 ccw(c2791.34,3641.73) 2791.34,3625.99 2802.19,3625.99 ccw(c2802.19,3666.31) 2830.71,3637.8 cw(c2859.22,3609.28) 2859.22,3649.61 2874.01,3649.61 2874.01,3673.23 cw(c2874.01,3712.6) 2834.64,3712.6
SIG/GND3:
  region net 3V3_FLASH: 3428.15,3713.58 ccw(c3423.4,3718.33) 3430.12,3718.34 3430.12,3735.17 ccw(c3413.32,3735.17) 3425.2,3747.05 3423.11,3748.82 ccw(c3410.33,3735.05) 3409.62,3753.82 cw(c3410.08,3768.23) 3395.67,3768.7 3395.67,3774.94 cw(c3409.11,3774.94) 3399.61,3784.45 ccw(c3390.1,3793.95) 3403.54,3793.95 3403.54,3804.84 ccw(c3336.34,3804.84) 3383.86,3852.36 3362.27,3873.95 ccw(c3345.47,3857.15) 3345.47,3880.91 3332.68,3880.91 ccw(c3332.68,3875) 3326.77,3875 3326.77,3800.2 ccw(c3338.58,3800.2) 3338.58,3788.39 3347.44,3788.39 cw(c3347.44,3778.54) 3357.28,3778.54 3357.28,3748.03 ccw(c3366.14,3748.03) 3366.14,3739.17 3396.65,3739.17 cw(c3396.65,3713.58) 3422.24,3713.58
  region net RS485_A: 2559.06,3397.64 ccw(c2559.06,3405.51) 2566.93,3405.51 2566.93,3417.32 ccw(c2559.06,3417.32) 2559.06,3425.2 2523.62,3425.2 ccw(c2523.62,3417.32) 2515.75,3417.32 2515.75,3409.45 ccw(c2527.56,3409.45) 2527.56,3397.64
  region net RS485_B: 2555.12,3374.02 cw(c2555.12,3358.27) 2570.87,3358.27 2570.87,3338.58 cw(c2555.12,3338.58) 2555.12,3322.83 2527.56,3322.83 cw(c2527.56,3334.65) 2515.75,3334.65 2515.75,3358.27 cw(c2531.5,3358.27) 2531.5,3374.02
  region net 5V_in: 2527.56,3456.69 ccw(c2539.37,3456.69) 2539.37,3444.88 2582.68,3444.88 ccw(c2582.68,3456.69) 2594.49,3456.69 2594.49,3464.57 ccw(c2582.68,3464.57) 2582.68,3476.38 2535.43,3476.38 ccw(c2535.43,3468.5) 2527.56,3468.5
  region net 5V_in: 3614.17,3314.96 ccw(c3602.36,3314.96) 3602.36,3326.77 3559.06,3326.77 ccw(c3559.06,3314.96) 3547.24,3314.96 3547.24,3307.09 ccw(c3559.06,3307.09) 3559.06,3295.28 3606.3,3295.28 ccw(c3606.3,3303.15) 3614.17,3303.15
  region net RS485_B: 3602.36,3397.64 cw(c3602.36,3413.39) 3586.61,3413.39 3586.61,3433.07 cw(c3602.36,3433.07) 3602.36,3448.82 3629.92,3448.82 cw(c3629.92,3437.01) 3641.73,3437.01 3641.73,3413.39 cw(c3625.98,3413.39) 3625.98,3397.64
  region net RS485_A: 3598.43,3374.02 ccw(c3598.43,3366.14) 3590.55,3366.14 3590.55,3354.33 ccw(c3598.43,3354.33) 3598.43,3346.46 3633.86,3346.46 ccw(c3633.86,3354.33) 3641.73,3354.33 3641.73,3362.2 ccw(c3629.92,3362.2) 3629.92,3374.02
  region net VBAT: 2787.4,2787.4 2787.4,2877.95 cw(c2799.21,2877.95) 2799.21,2889.76 2811.02,2889.76 cw(c2811.02,2870.08) 2830.71,2870.08 ccw(c2846.46,2870.08) 2846.46,2854.33 2874.41,2854.33 ccw(c2874.41,2948.42) 2940.94,2881.89 2972.44,2850.39 cw(c2934.43,2850.39) 2961.31,2823.51 2901.57,2763.78 cw(c2854.05,2811.3) 2854.05,2744.09 2830.71,2744.09 cw(c2830.71,2787.4)
  region net 5V_in: 3367.77,3132.23 ccw(c3381.21,3145.67) 3367.77,3132.23 3389.96,3110.04 cw(c3342.92,3062.99) 3409.45,3062.99 3449.97,3022.47 cw(c3443.25,3015.75) 3452.76,3015.75 3476.38,3039.37 cw(c3504.89,3067.88) 3464.57,3067.88 3464.57,3157.48 ccw(c3445.56,3157.48) 3459,3170.92 3425.2,3204.72 ccw(c3415.69,3195.22) 3415.69,3208.66 3409.45,3208.66 ccw(c3409.45,3170.64) 3382.57,3197.53 ccw(c3431.72,3148.37) 3382.57,3197.53 3359.9,3174.86 ccw(c3373.34,3161.42) 3354.33,3161.42 ccw(c3392.35,3161.42) 3365.47,3134.53 3367.77,3132.23
  region net VBAT/5V: 3430.12,2979.33 3430.12,2946.58 ccw(c3460.36,2946.58) 3438.98,2925.2 3443.08,2921.09 ccw(c3449.8,2927.81) 3449.8,2918.31 3450.55,2918.31 ccw(c3450.55,2928.39) 3457.68,2921.26 3466.54,2912.4 3462.48,2908.35 ccw(c3471.29,2899.54) 3458.83,2899.54 3458.83,2898.53 cw(c3448.7,2898.53) 3455.86,2891.37 3454.97,2890.47 cw(c3445.9,2899.54) 3445.9,2886.72 ccw(c3445.9,2875.75) 3438.15,2883.5 3431.4,2876.75 3422.24,2885.91 3422.24,2885.98 3423.44,2887.18 ccw(c3414.75,2895.88) 3427.04,2895.88 3427.04,2897.01 ccw(c3414.66,2897.01) 3423.41,2905.76 3419.72,2909.46 cw(c3477.94,2967.68) 3395.61,2967.68 3395.61,2977.2 cw(c3403.66,2977.2) 3397.96,2982.9
  region net 3V3_MCU2: 2804.13,3617.13 cw(c2804.13,3639.76) 2781.5,3639.76 2781.5,3644.72 cw(c2821.82,3644.72) 2793.31,3673.23 2806.73,3686.65 ccw(c2791.61,3701.77) 2812.99,3701.77 cw(c2816.93,3701.77) 2816.93,3705.71 2833.66,3705.71 cw(c2833.66,3701.77) 2837.6,3701.77 2837.6,3625 cw(c2829.72,3625) 2829.72,3617.13
  region net 3V3_ICM: 3208.66,3988.26 ccw(c3225.46,3988.26) 3213.58,3976.38 3215.36,3974.6 cw(c3193.52,3952.76) 3224.41,3952.76 ccw(c3232.28,3952.76) 3232.28,3944.88 3314.96,3944.88 ccw(c3314.96,3956.69) 3326.77,3956.69 3326.77,3984.93 cw(c3353.66,3984.93) 3334.65,4003.94 3340.89,4010.18 cw(c3354.33,3996.74) 3354.33,4015.75 3354.33,4027.56 3338.58,4027.56 cw(c3329.08,4027.56) 3335.8,4020.84 3322.83,4007.87 cw(c3303.82,4026.88) 3303.82,4000 3239.35,4000 cw(c3243.43,4012.15) 3234.36,4003.09 ccw(c3225.18,3993.91) 3225.18,4006.89 3223.43,4006.89 ccw(c3223.43,3992.13) 3208.66,3992.13
  region net 3V3_BNO: 3559.06,3937.01 cw(c3551.5,3929.45) 3562.18,3929.45 3562.18,3898.45 ccw(c3574.8,3898.45) 3574.8,3885.83 3582.68,3885.83 ccw(c3582.68,3893.7) 3590.55,3893.7 3590.55,3913.39 cw(c3598.43,3913.39) 3598.43,3921.26 3598.43,3937.01
  region net 3V3_main: 3311.02,3496.06 cw(c3311.02,3490.16) 3316.93,3490.16 3316.93,3476.38 ccw(c3338.58,3476.38) 3338.58,3454.72 3346.46,3454.72 cw(c3346.46,3446.85) 3354.33,3446.85 3354.33,3427.17 cw(c3346.46,3427.16) 3346.46,3419.29 3250.98,3419.29 cw(c3250.98,3450.79) 3219.49,3450.79 3219.49,3464.57 cw(c3250.98,3464.57) 3250.98,3496.06
  region net 3V3_BZ: 2681.1,3141.06 cw(c2654.22,3141.06) 2673.23,3122.05 2672.55,3121.37 ccw(c2699.44,3094.49) 2661.42,3094.49 2661.42,3090.55 ccw(c2673.23,3090.55) 2673.23,3078.74 2692.91,3078.74 ccw(c2692.91,3094.49) 2708.66,3094.49 2708.66,3208.66 ccw(c2700.79,3208.66) 2700.79,3216.54 2688.98,3216.54 ccw(c2688.98,3208.66) 2681.1,3208.66
  region net 3V3_main: 2618.11,3169.29 ccw(c2618.11,3188.3) 2631.55,3174.86 2637.8,3181.1 cw(c2656.8,3162.09) 2656.8,3188.98 2657.48,3188.98 ccw(c2657.48,3204.72) 2673.23,3204.72 2673.23,3208.66 ccw(c2661.42,3208.66) 2661.42,3220.47 2633.18,3220.47 ccw(c2633.18,3193.59) 2614.17,3212.6 2609.56,3207.99 ccw(c2636.44,3181.1) 2598.43,3181.1 ccw(c2607.93,3181.1) 2601.21,3174.38 2602.36,3173.23 ccw(c2611.87,3182.73) 2611.87,3169.29
  region net 3V3_ERM: 2559.06,2759.84 cw(c2559.06,2767.72) 2551.18,2767.72 2551.18,2799.21 cw(c2582.68,2799.21) 2582.68,2830.71 2625.98,2830.71 cw(c2625.98,2818.9) 2637.8,2818.9 2637.8,2814.96 cw(c2625.98,2814.96) 2625.98,2803.15 ccw(c2625.98,2795.28) 2618.11,2795.28 2618.11,2771.65 cw(c2606.3,2771.65) 2606.3,2759.84
  region net NetD21_2: 2484.25,2838.58 2484.25,2822.83 cw(c2456.69,2822.83) 2456.69,2795.28 ccw(c2456.69,2775.59) 2437.01,2775.59 2437.01,2771.65 ccw(c2452.76,2771.65) 2452.76,2755.91 2492.13,2755.91 ccw(c2492.13,2791.34) 2527.56,2791.34 2527.56,2830.71 ccw(c2511.81,2830.71) 2511.81,2846.46 2492.13,2846.46 ccw(c2492.13,2838.58)
GND1 (plane layer: these items are gaps in the copper):
  region: 2381.89,4074.8 2381.89,3818.9 2637.79,3818.9 2637.79,4074.8
GND2 (plane layer: these items are gaps in the copper):
  region: 2381.89,4074.8 2381.89,3818.9 2637.79,3818.9 2637.79,4074.8

## Silkscreen, mask and mechanical layers (free items; w line width, h text height)
Top Overlay:
  drawing of 11 lines, arcs and shapes, not listed
  text "Model: ES-Node / Version: V1.0 / Date: 25/03/2026" at 3326.77,3586.37 h47.24
  text "RGB LED" at 2996.06,3218.5 h47.24
  text "FLEX" at 3031.62,2834.65 h47.24
Bottom Overlay:
  drawing of 19 lines, arcs and shapes, not listed
  text "DIO" at 2649.61,3740.16 h39.37
  text "SWO" at 2724.63,3700.79 h39.37
  text "CLK" at 2649.61,3661.42 h39.37
  text "RST" at 2712.6,3622.05 h39.37
  text "GND" at 2661.34,3582.68 h39.37

## Text inside footprints (layer, text, board x,y; h text height)
J1: Top Assembly "PCB Edge" at 3570.91,2802.06 h27.56 r45
LS1: Top Overlay "+" at 2700.9,3165.31 h39.37 r270; Top Overlay "-" at 2700.9,3075.31 h39.37 r270